# EAGLE schematic mod_mixer_v0.3a (EAGLE 7.2.0)
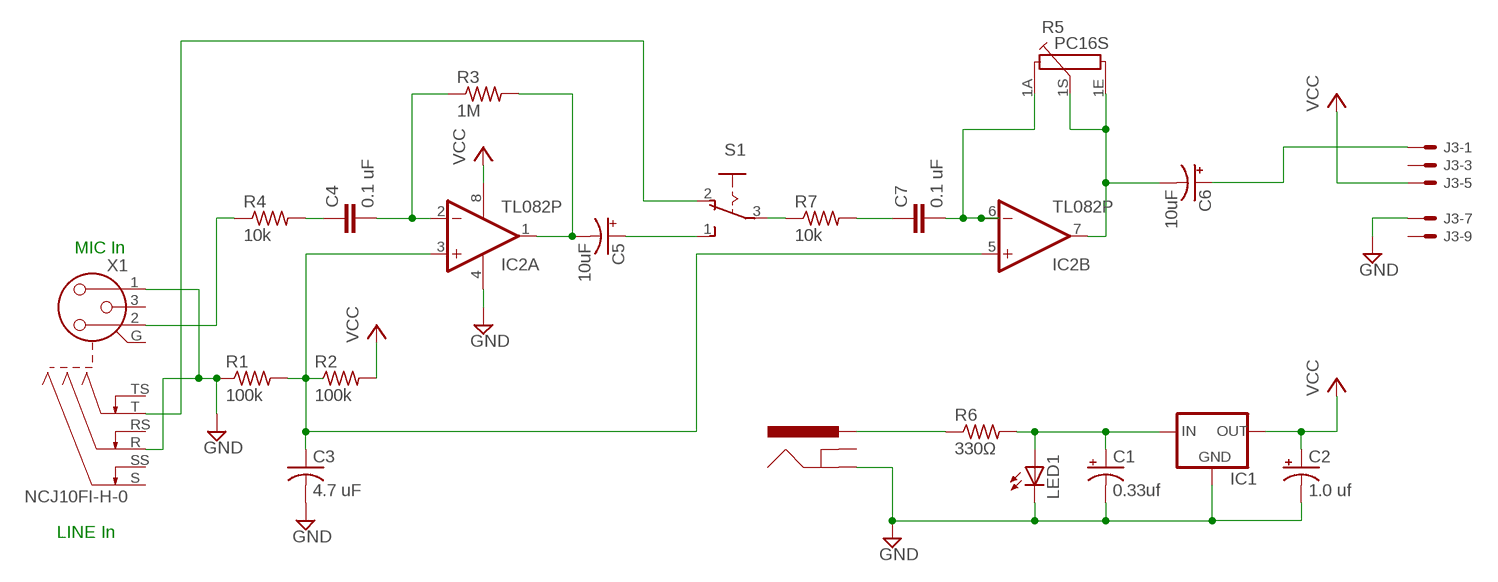
[diagram p0: schematic, sheet 1]

## Parts
C1  0.33uf  CPOL-USE2.5-6  [E2,5-6]
C2  1.0 uf  CPOL-USE2.5-6  [E2,5-6]
C3  4.7 uF  C-US050-030X075  [C050-030X075]
C4  0.1 uF  C5/2.5  [C5B2.5]
C5  10uF  CPOL-USE5-6  [E5-6]
C6  10uF  CPOL-USE2.5-7  [E2,5-7]
C7  0.1 uF  C5/2.5  [C5B2.5]
IC1  V_REG_78XXSIDE  [78XXL]
IC2  TL082P  [DIL08]
J1  POWER_JACKSLT  [POWER_JACK_SLOT]
J3  CON-50-EDGE  [CARDEDGE-50]
LED1  LEDSFH480  [SFH480]
R1  100k  R-US_0207/10  [0207/10]
R2  100k  R-US_0207/10  [0207/10]
R3  1M  R-US_0207/10  [0207/10]
R4  10k  R-US_0207/10  [0207/10]
R5  PC16S  [PC16S]
R6  330Ω  R-US_0207/10  [0207/10]
R7  10k  R-US_0207/10  [0207/10]
S1  255SB  [255SB]
X1  NCJ10FI-H-0  [NCJ10FI-H-0]

## Nets
GND: C1.- C2.- C3.2 IC1.GND IC2.4(P:V-) J1.GND@2(GND) J3.7 LED1.K(C) R1.1 X1.1 X1.R
N$1: C3.1 IC2.3(A:+IN) IC2.5(B:+IN) R1.2 R2.1
N$2: J1.PWR R6.1
N$3: C7.1 R7.2
N$4: C4.2 IC2.2(A:-IN) R3.1
N$5: C7.2 IC2.6(B:-IN) R5.1A
N$6: C1.+ IC1.IN LED1.A R6.2
N$7: C5.- IC2.1(A:OUT) R3.2
N$8: C6.+ J3.1
N$9: S1.2(O) X1.T
N$10: R4.1 X1.2
N$11: C5.+ S1.1(S)
N$13: C4.1 R4.2
N$14: R7.1 S1.3(P)
N$15: C6.- IC2.7(B:OUT) R5.1E R5.1S
VCC: C2.+ IC1.OUT IC2.8(P:V+) J3.5 R2.2
Unconnected: J1.GND@1(GNDBREAK) J3.3 J3.9 X1.3 X1.G X1.RS X1.S X1.SS X1.TS

## Notes on the sheet
- MIC In
- LINE In

## Library data of the parts
C1 C2 C5 C6 = rcl:CPOL-US: POLARIZED CAPACITOR, American symbol
C3 = resistor:C-US: CAPACITOR, American symbol
C4 C7 = capacitor-wima:C: CAPACITOR
IC1 = SparkFun:V_REG_78XX: Voltage Regulator Standard 7805 5V regulator. IGO (Input Ground Output). Spark Fun Electronics SKU : COM-00107
IC2 = linear:TL082: OP AMP Data sheet; DATA_SHEET: <a href="http://www.ti.com/lit/ds/symlink/tl084a.pdf"> Data sheet </a>
J1 = SparkFun:POWER_JACK: Power Jack This is the standard 5.5mm barrel jack for power. The PTH is the most common, proven, reliable, footprint. All others are experimental. The Slot footprint only works if the mill layer is transmitted to the PCB fab house so be warned. Spark Fun Electronics SKU : PRT-00119. Mating wall ...
J3 = card-edge_5pin_b:CON-50: Connector 50-pin
LED1 = led:LED: LED
R1-R4 R6 R7 = resistor:R-US_: RESISTOR, American symbol
R5 = piherUPDATE:PC16S: POTENTIOMETER single carbon potentiometer, 16 mm, S3ROH; OC_FARNELL: 4452940; OC_NEWARK: unknown
S1 = switchUPDATE:255SB: SLIDING SWITCH Distributor Buerklin, 11G810
X1 = con-neutrik_ag:NCJ10FI-: Neutrik Audio Connector XLR SERIES Stereo 1/4" jack with switch Source: www.neutrik.com/; MPN: NCJ10FI-H-0; OC_FARNELL: unknown; OC_NEWARK: 99B1398